# Altium PCB GC9A01.PcbDoc
Units mil, origin at the board's own origin, x right, y up, seen from the top; angles counter-clockwise.
Board outline 787.4 x 787.4 mil, 2 copper layers (Top Layer, Bottom Layer); 7 components, 11 nets, 33 pads, 43 vias.
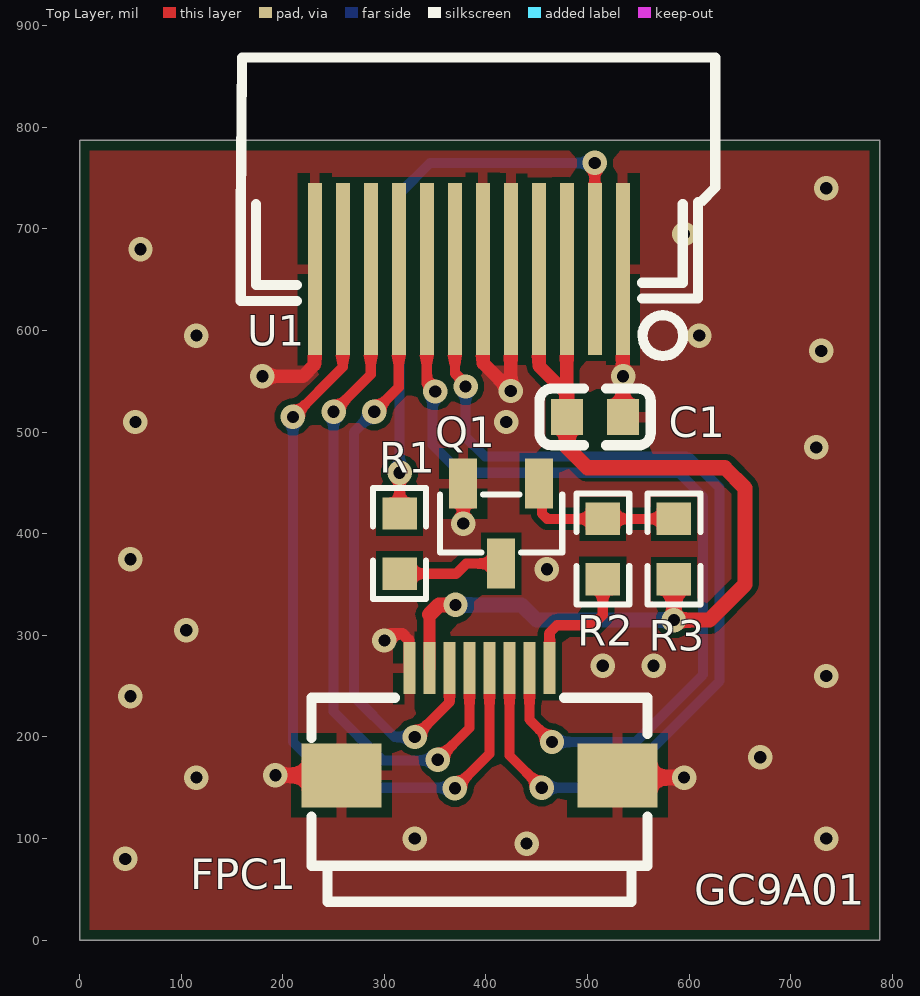
[diagram p0: Top Layer view]
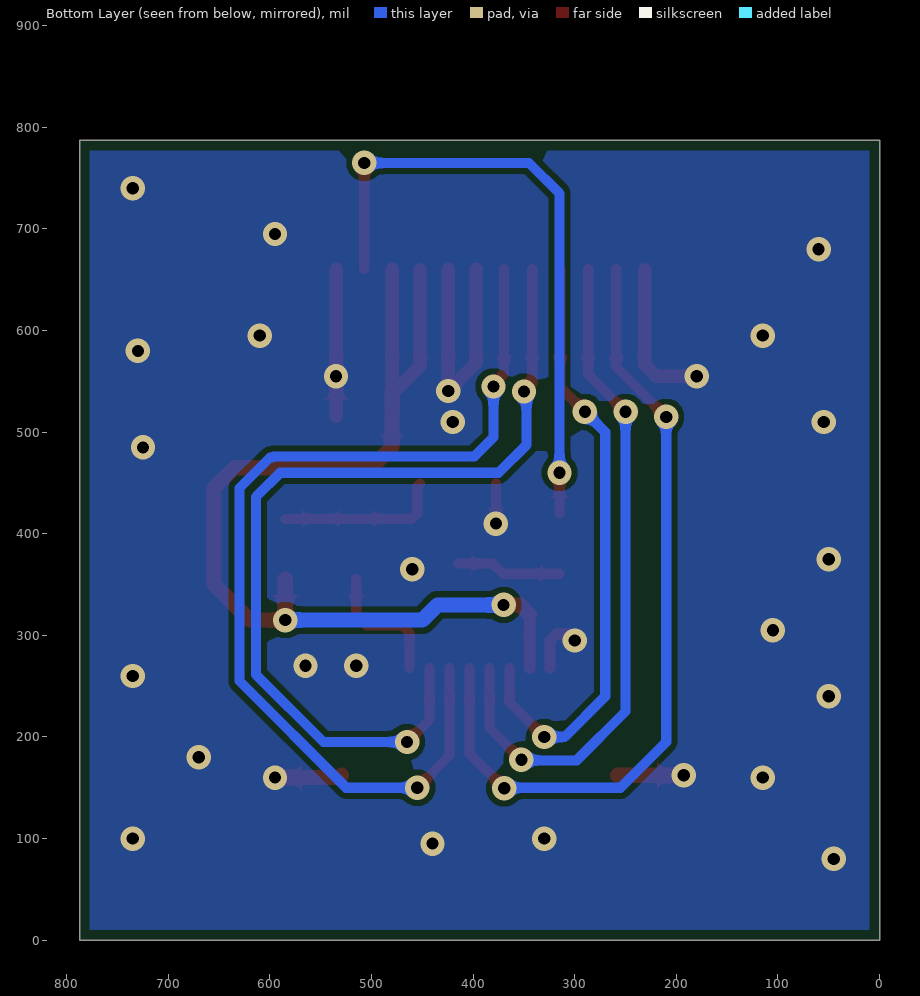
[diagram p1: Bottom Layer view, seen from below]
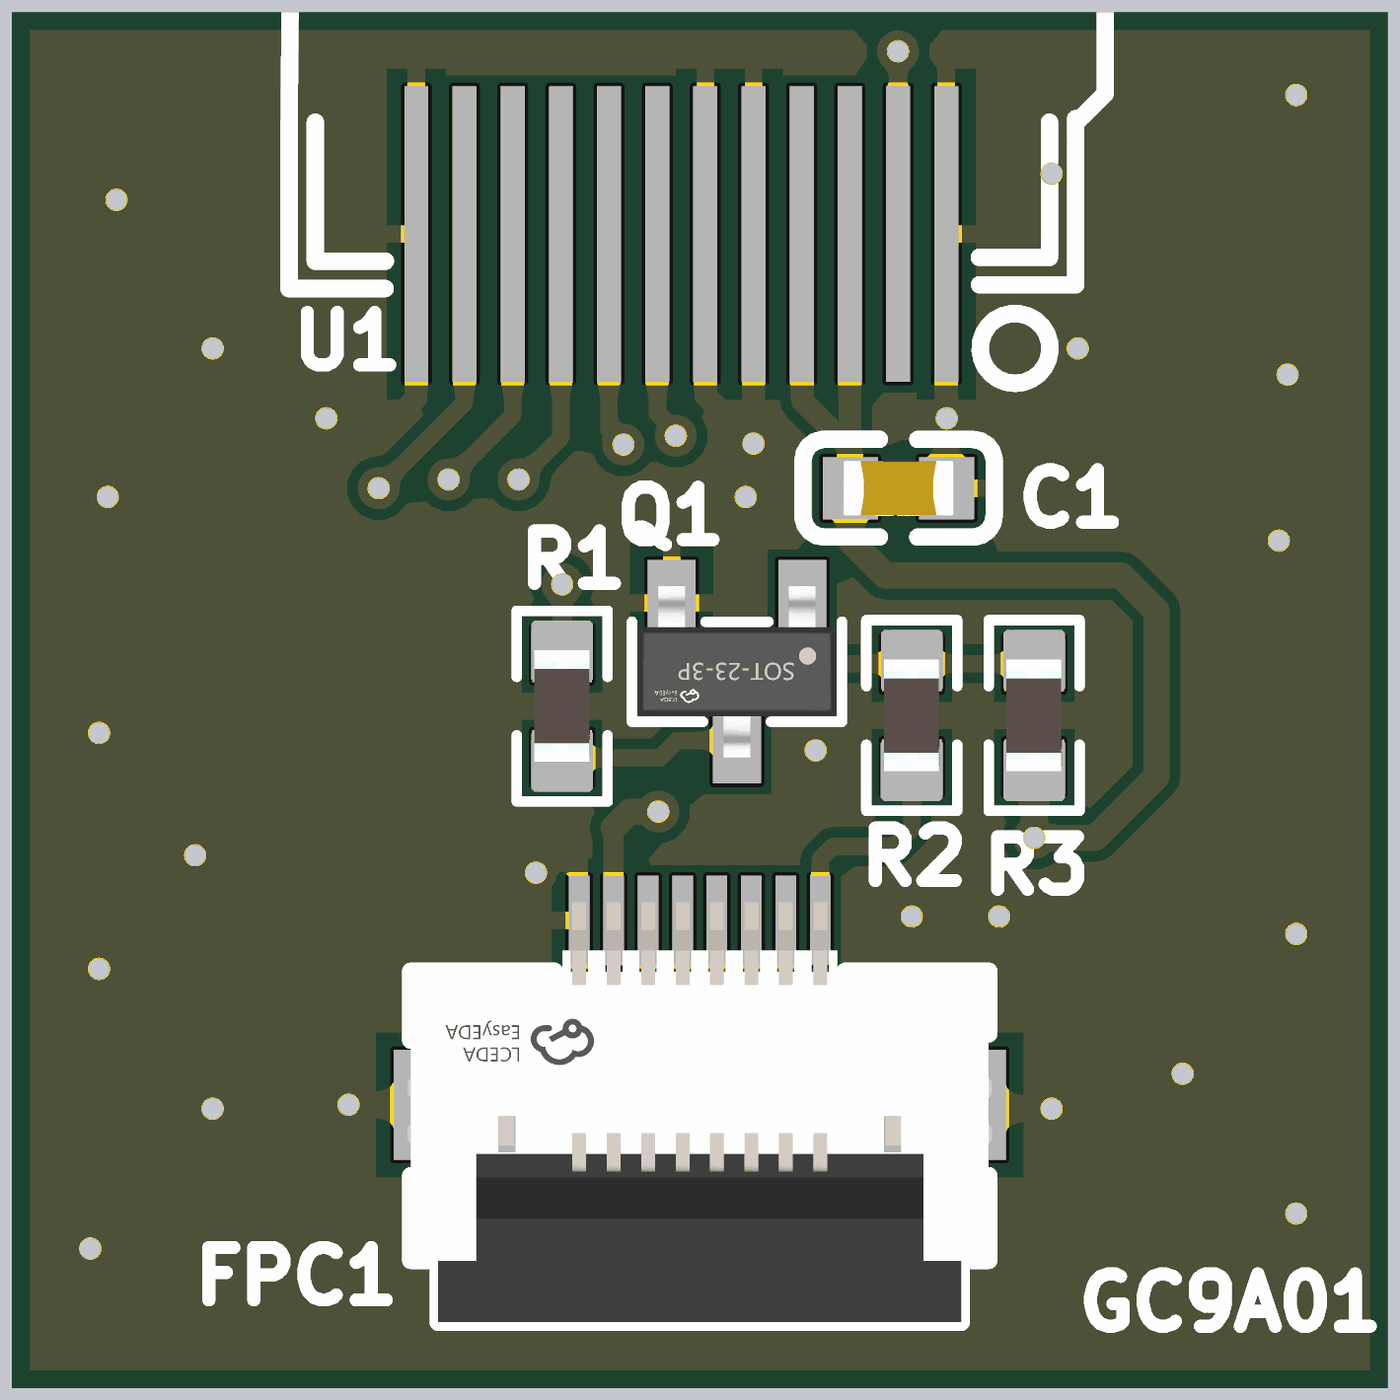
[diagram p2: 3D render of the assembled board from above, using the file's embedded part models]

## Layer stack, top to bottom
Top Solder: solder mask 0.4, Solder Resist, Dk 3.5
Top Layer: signal copper 1.4
Dielectric 1: dielectric 12.6, FR-4, Dk 4.8
Bottom Layer: signal copper 1.4
Bottom Solder: solder mask 0.4, Solder Resist, Dk 3.5

## Board outline
0,0 0,787.4 787.4,787.4 787.4,0

## Design rules (kind name [scope] priority, off if disabled: settings)
BoardOutlineClearance ExternalComponent_BoardOutlineClearance_1 [(InComponent('U1'))] p1: gap=10 ignorepadtopadclearanceinfootprint=FALSE except(0: Arc-OutlineEdge Arc-SplitContinuation Track-OutlineEdge Track-SplitContinuation SMDPad-SplitContinuation THPad-SplitContinuation Via-SplitContinuation Fill-SplitContinuation Poly-SplitContinuation Region-SplitContinuation Text-SplitContinuation)
BoardOutlineClearance [All] p2: gap=10 ignorepadtopadclearanceinfootprint=FALSE except(0: Arc-SplitContinuation Track-SplitContinuation SMDPad-SplitContinuation THPad-SplitContinuation Via-SplitContinuation Fill-SplitContinuation Poly-SplitContinuation Region-SplitContinuation Text-SplitContinuation)
Clearance [All] p1: gap=6 ignorepadtopadclearanceinfootprint=TRUE except(6.9: Arc-Hole Track-Hole SMDPad-Hole THPad-Hole Via-Hole Fill-Hole Poly-Hole Region-Hole Text-Hole)
DiffPairsRouting [All] p1: maxlimit=110 minlimit=6 mostfreqgap=6 toplayer_minwidth=10 toplayer_maxwidth=10 toplayer_prefwidth=10 bottomlayer_minwidth=10 bottomlayer_maxwidth=10 bottomlayer_prefwidth=10 maxuncoupledlength=10
MatchedLengths DiffPair_USBMatchedLengths [InDifferentialPairClass('USB')] p1: tolerance=10 checknetsindiffpair=FALSE checkdiffpairvsdiffpair=TRUE checkxsignals=TRUE checkothers=TRUE
MatchedLengths [InDifferentialPair ('USB')] p2: tolerance=1000 checknetsindiffpair=FALSE checkdiffpairvsdiffpair=TRUE checkxsignals=TRUE checkothers=TRUE
MinimumSolderMaskSliver Densepads_MinimumSolderMaskSliver [(HasFootprint('USB-C-SMD_KH-TYPE-C-16P') OR HasFootprint('FPC-SMD_P0.50-8P_FGS-XJ-H2.0') OR HasFootprint('FPC_0.7-12P_SMT'))] p1: minsoldermaskwidth=3
MinimumSolderMaskSliver [All] p2: minsoldermaskwidth=10
PolygonConnect PolygonConnect_GND [InNet('GND')] p1: thpad.connectstyle=Relief thpad.reliefconductorwidth=10 thpad.reliefentries=4 thpad.polygonreliefangle="90 Angle" thpad.airgapwidth=10 smdpad.connectstyle=Relief smdpad.reliefconductorwidth=10 smdpad.reliefentries=4 smdpad.polygonreliefangle="90 Angle" smdpad.airgapwidth=10 via.connectstyle=Direct via.reliefconductorwidth=10 via.reliefentries=4 via.polygonreliefangle="90 Angle" via.airgapwidth=10
PolygonConnect power_plane [(InNet('NetC13_2') OR InNet('NetL1_1') OR InNet('PW_5V') OR InNet('PW_D3.3V') OR InNet('PW_BAT4.2V'))] p2: connectstyle=Direct reliefconductorwidth=10 reliefentries=4 polygonreliefangle="90 Angle" airgapwidth=10
PolygonConnect [All] p3: connectstyle=Relief reliefconductorwidth=10 reliefentries=4 polygonreliefangle="90 Angle" airgapwidth=10
RoutingVias [All] p1: holewidth=12 width=24 viastyle="Through Hole" minholewidth=5 minwidth=10 maxholewidth=100 maxwidth=100
SilkToSilkClearance [All] p1: silktosilkclearance=0
SilkToSolderMaskClearance [IsPad] p1: minsilkscreentomaskgap=0 clearancetoexposedcopper=FALSE
SolderMaskExpansion "Via SolderMask" [IsVia] p1: expansion=4 istentingtop=TRUE
SolderMaskExpansion [All] p2: expansion=2 istentingtop=FALSE
SupplyNets "Schematic Supply Nets_3" [InNet('PW_D5V')] p1: voltage=0.000
SupplyNets "Schematic Supply Nets_2" [InNet('PW_D3.3V')] p2: voltage=0.000
SupplyNets "Schematic Supply Nets_5" [InNet('PW_5V')] p3: voltage=0.000
SupplyNets "Schematic Supply Nets_4" [InNet('PW_BAT4.2V')] p4: voltage=0.000
SupplyNets "Schematic Supply Nets_1" [InNet('PW_USB5V')] p5: voltage=0.000
SupplyNets "Schematic Supply Nets" [InNet('GND')] p6: voltage=0.000
Width GND_Width [InNet('GND')] p1: maxlimit=100 minlimit=10 preferedwidth=40 minimp=50.000000 maximp=50.000000 favimp=50.000000
Width power_width [(InNet('PW_BAT4.2V') OR InNet('PW_5V') OR InNet('PW_USB5V') OR InNet('PW_D5V') OR InNet('NetF1_1') OR InNet('PW_D3.3V'))] p2: maxlimit=150 minlimit=10 preferedwidth=40
Width [All] p3: maxlimit=100 minlimit=10 preferedwidth=10 minimp=50.000000 maximp=50.000000 favimp=50.000000
26 further rules are at their usual default settings.

## Components (designator, comment, footprint, x,y, rotation, side; value= is the part's Value field where it differs from the comment)
C1 "100nF" C0603 507.44,515 r180 top
FPC1 "AFC01-S08FCA-00" FPC-SMD_P0.50-8P_FGS-XJ-H2.0 393.7,215 r0 top locked
Q1 "SS8050" SOT-23-3_L2.9-W1.3-P1.90-LS2.4-BR 415,410 r90 top locked
R1 "10Ω" R0603 315,390.34 r90 top locked
R2 "1kΩ" R0603 515,385 r90 top locked
R3 "10kΩ" R0603 585,385 r90 top locked
U1 "IPS130-12" FPC_0.7-12P_SMT 393.7,725 r0 top locked

## Footprints (in the part's own frame and the unit in brackets; to place one, negate y for a bottom-side part, rotate by r counter-clockwise, add the part's x,y. Pads: shape width x height; smd on the part's side, far side on the other; paste and mask are expansions set on the pad)
C0603 [mm]
  rect 0.8x0.9 smd: 1(-0.7,0) 2(0.7,0)
  silkscreen extent -1.39,-0.71 1.39,0.71, body extent -0.8,-0.4 0.8,0.4, height 0.8
FPC-SMD_P0.50-8P_FGS-XJ-H2.0 [mm]
  rect 0.3x1.3 smd paste+0 mask+0.05: 1(-1.75,1.34) 2(-1.252,1.338) 3(-0.75,1.34) 4(-0.25,1.34) 5(0.25,1.34) 6(0.75,1.34) 7(1.25,1.34) 8(1.75,1.34)
  rect 2x1.6 smd: 9(3.45,-1.34) 10(-3.45,-1.34)
  silkscreen extent -4.2,-4.5 4.2,0.6, body extent -4.25,-4.5 4.25,1.6, height 2.01
FPC_0.7-12P_SMT [mm]
  rect 0.35x4.3 smd paste+0 mask+0.051: 1(3.582,-1.64) 2(2.882,-1.64) 3(2.182,-1.64) 4(1.482,-1.64) 5(0.782,-1.64) 6(0.082,-1.64) 7(-0.618,-1.64) 8(-1.318,-1.64) 9(-2.018,-1.64) 10(-2.718,-1.64) 11(-3.418,-1.64) 12(-4.118,-1.64)
  silkscreen extent -5.97,-3.81 5.89,3.65
R0603 [mil]
  rect 31.75x34.02 smd paste-3937.01 mask+2: 1(-29.66,0) 2(29.66,0)
  silkscreen extent -55,-26 55,26, body extent -32,-16 32,16, height 18
SOT-23-3_L2.9-W1.3-P1.90-LS2.4-BR [mm]
  rect 1.25x0.7 smd: 1(1,-0.95) 2(1,0.95) 3(-1,0)
  silkscreen extent -0.73,-1.53 0.73,1.53, body extent -1.25,-1.45 1.25,1.45, height 1.05

## Part data
C1: library part CL10B104KB8NNNC, JLCPCB Part Class="Extended Part", LCSC Part Name="100nF ±10% 50V", Manufacturer=SAMSUNG(三星), Temperature Coefficient=X7R, Tolerance=±10%, Voltage Rated=50V, Add into BOM=yes, Convert to PCB=yes, Datasheet=https://atta.szlcsc.com/upload/public/pdf/source/20160218/1457707763339.pdf, Device=CL10B104KB8NNNC, Manufacturer Part=CL10B104KB8NNNC, Supplier=LCSC, Supplier Footprint=0603, Supplier Part=C1591, Symbol=CL10B104KB8NNNC
FPC1: JLCPCB Part Class="Extended Part", LCSC Part Name="间距:0.5mm P数:8P 翻盖式 下接", Manufacturer=JS(钜硕电子), Add into BOM=yes, Contact Type=下接, Convert to PCB=yes, Datasheet=https://atta.szlcsc.com/upload/public/pdf/source/20190816/C413942_2A72D1AC756EAE17EEDF756A339D4500.pdf, Device=AFC01-S08FCA-00, FFC, FCB Thickness=0.3mm, Height Above Board=2mm, Locking Feature=翻盖式, Manufacturer Part=AFC01-S08FCA-00, Mounting Type=卧贴, Number of Contacts=8P, Pitch=0.5mm, Supplier=LCSC, Supplier Footprint=SMD,P=0.5mm,卧贴, Supplier Part=C262657, Symbol=AFC01-S08FCA-00
Q1: library part SS8050_C541705, Collector Current (Ic)=1.5A, Collector Cut-Off Current (Icbo)=150nA, Collector-Emitter Breakdown Voltage (Vceo)=25V, Collector-Emitter Saturation Voltage (VCE(sat)@Ic,Ib)=500mV@800mA,80mA, DC Current Gain (hFE@Ic,Vce)=200@100mA,1V, JLCPCB Part Class="Extended Part", LCSC Part Name="耐压:25V 电流:1.5A NPN", Manufacturer=AnBon(安邦), Operating Temperature=-55℃~+150℃@(Tj), Power Dissipation (Pd)=225mW, Transition Frequency (fT)=-, Add into BOM=yes, Convert to PCB=yes, Datasheet=https://atta.szlcsc.com/upload/public/pdf/source/20200522/C541705_DD3461D9C64B1D59801CB3041082AFC6.pdf, Device=SS8050_C541705, Manufacturer Part=SS8050, Supplier=LCSC, Supplier Footprint=SOT-23, Supplier Part=C541705, Symbol=SS8050_C541705, Transistor Type=NPN
R1: library part 0603WAF100JT5E, JLCPCB Part Class="Basic Part", LCSC Part Name="10Ω ±1% 100mW 厚膜电阻", Manufacturer=UNI-ROYAL(厚声), Operating Temperature Range=-55℃~+155℃, Overload Voltage (Max)=75V, Power(Watts)=100mW, Temperature Coefficient=±400ppm/℃, Tolerance=±1%, Add into BOM=yes, Convert to PCB=yes, Datasheet=https://atta.szlcsc.com/upload/public/pdf/source/20200306/C422600_1E6D84923E4A46A82E41ADD87F860B5C.pdf, Device=0603WAF100JT5E, Manufacturer Part=0603WAF100JT5E, Supplier=LCSC, Supplier Footprint=0603, Supplier Part=C22859, Symbol=0603WAF100JT5E, Type=厚膜电阻
R2: library part 0603WAF1001T5E, JLCPCB Part Class="Basic Part", LCSC Part Name="1kΩ ±1% 100mW 厚膜电阻", Manufacturer=UNI-ROYAL(厚声), Operating Temperature Range=-55℃~+155℃, Overload Voltage (Max)=75V, Power(Watts)=100mW, Temperature Coefficient=±100ppm/℃, Tolerance=±1%, Add into BOM=yes, Convert to PCB=yes, Datasheet=https://atta.szlcsc.com/upload/public/pdf/source/20200306/C422600_1E6D84923E4A46A82E41ADD87F860B5C.pdf, Device=0603WAF1001T5E, Manufacturer Part=0603WAF1001T5E, Supplier=LCSC, Supplier Footprint=0603, Supplier Part=C21190, Symbol=0603WAF1001T5E, Type=厚膜电阻
R3: library part 0603WAF1002T5E, JLCPCB Part Class="Basic Part", LCSC Part Name="厚膜电阻 10kΩ ±1% 100mW", Manufacturer=UNI-ROYAL(厚声), Operating Temperature Range=-55℃~+155℃, Overload Voltage (Max)=75V, Power(Watts)=100mW, Temperature Coefficient=±100ppm/℃, Tolerance=±1%, Add into BOM=yes, Convert to PCB=yes, Datasheet=https://atta.szlcsc.com/upload/public/pdf/source/20200306/C422600_1E6D84923E4A46A82E41ADD87F860B5C.pdf, Device=0603WAF1002T5E, Manufacturer Part=0603WAF1002T5E, Supplier=LCSC, Supplier Footprint=0603, Supplier Part=C25804, Symbol=0603WAF1002T5E, Type=厚膜电阻

## Via types
v1: diameter 24, hole 12, Top Layer to Bottom Layer, tented both sides, 43 vias

## Nets (pads, with @x,y where several pads share a name; then routed paths per layer and width w, separated by ;. In a path a pad name is that pad's centre, name@x,y a point inside that pad or via, vN(x,y) a via of type N, cw(c..) or ccw(c..) an arc to the next point about the centre after c; other vN are vias at no path point)
BLK: FPC1.8 R2.1 | length 129.8
  Top Layer w10: FPC1.8 462.6,302.6 470,310 505,310 515,320 R2.1
CS: FPC1.7 U1.8 | length 897.9
  Top Layer w10: U1.8 341.79,548.21 v1(350,540) ; FPC1.7 442.91,217.09 v1(465,195)
  Bottom Layer w10: v1(350,540) 347.39,537.39 347.39,487.61 375,460 590,460 613.69,436.31 613.69,261.31 547.37,195 515,195 v1(465,195)
DC: FPC1.6 U1.7 | length 979.7
  Top Layer w10: U1.7@369.52,660.28 369.52,557.86 380,547.37 v1(380,545) ; FPC1.6 423.23,181.77 v1(455,150)
  Bottom Layer w10: v1(380,545) 380,495 399,476 596.63,476 597.63,475 600,475 630,445 630,255 525,150 v1(455,150)
GND: C1.1 FPC1.1 FPC1.9 FPC1.10 Q1.2 U1.1 U1.5 U1.6 U1.12 | length 774.3
  Top Layer w10: v1(377.6,410) Q1.2
  Top Layer w11: v1(300,295) 306.59,301.59 317.95,301.59 324.4,295.15 324.4,268.16 FPC1.1
  Top Layer w13: v1(180,555) 220,555 231.17,566.17 U1.12@231.17,660.04 ; U1.6 397.29,660.05 397.29,567.71 v1(424.47,540.53) U1.5 ; C1.1@534.71,515.29 U1.1
  Top Layer w15: v1(192.75,162.25) FPC1.10 ; FPC1.9 531.77,160 v1(595,160)
  other v1: 45,80 440,95 330,100 735,100 115,160 670,180 50,240 735,260 515,270 565,270 105,305 460,365 50,375 725,485 55,510 420,510 535,555 730,580 115,595 610,595 60,680 595,695 735,740
LEDK: R1.2 U1.2 | length 624.1
  Top Layer w10: R1.2 v1(315,460) ; U1.2 v1@507.15,765
  Bottom Layer w10: v1(315,460) 315,735 345,765 v1(507.15,765)
NetQ1_1: Q1.1 R2.2 R3.2 | length 162.7
  Top Layer w10: Q1.1 455,446.77 455,420 460.34,414.66 R2.2 R3.2
NetQ1_3: Q1.3 R1.1 | length 104.1
  Top Layer w10: R1.1 370.68,360.68 380.63,370.63 Q1.3
RESET: FPC1.5 U1.11 | length 796.5
  Top Layer w10: v1(210,515) 259.12,564.12 U1.11 ; v1(369.47,149.47) 403.54,183.54 FPC1.5
  Bottom Layer w10: v1(210,515) 210,195 255,150 368.94,150 v1(369.47,149.47)
SCL: FPC1.3 U1.9 | length 597.2
  Top Layer w10: v1(290,520) 314.24,544.24 U1.9 ; v1(330,200) 364.17,234.17 FPC1.3
  Bottom Layer w10: v1(290,520) 270,500 270,240 310,200 v1(330,200)
SDA: FPC1.4 U1.10 | length 676.5
  Top Layer w10: v1(250,520) 286.68,556.68 U1.10 ; v1(352.5,177.5) 383.86,208.86 FPC1.4
  Bottom Layer w10: v1(250,520) 250,225 298,177 352,177 v1(352.5,177.5)
VCC: C1.2 FPC1.2 R3.1 U1.3 U1.4 | length 1017.8
  Top Layer w11.5: FPC1.2 344.41,320.59
  Top Layer w13: U1.4@452.42,660.04 452.42,565 477.42,540 479.59,540 U1.3
  Top Layer w15: 344.41,320.59 353.82,330 v1(370,330) ; C1.2@479.59,520.29 479.59,540 ; C1.2 480,514.88 480,485 500,465 635,465 655,445 655,350 620,315 v1(585,315) R3.1
  Bottom Layer w15: v1(370,330) 435,330 450,315 v1(585,315)

## Polygon pours and split planes (outlines as drawn)
GND on Top Layer "GND_L01_P000" (solid, remove dead copper, pour order 0): 0,0 0,787.4 787.4,787.4 787.4,0
GND on Bottom Layer "GND_L02_P001" (solid, remove dead copper, pour order 1): 0,0 0,787.4 787.4,787.4 787.4,0

## Silkscreen, mask and mechanical layers (free items; w line width, h text height)
Top Overlay:
  text "GC9A01" at 605,35 h30
Mechanical 1:
  the board outline again, w10
Drill Drawing:
  text ".Legend" at 990,594.99 h60